# Altium PCB SensWear-V1R1-MainBoard.PcbDoc (part 2 of 3)
Units mm, origin at the board's own origin, x right, y up, seen from the top; angles counter-clockwise.
Board outline 50.5 x 8.5 mm, 4 copper layers (Top Layer, Layer 1, Layer 2, Bottom Layer), stack 0.148 mm thick; 73 components, 59 nets, 271 pads, 109 vias.
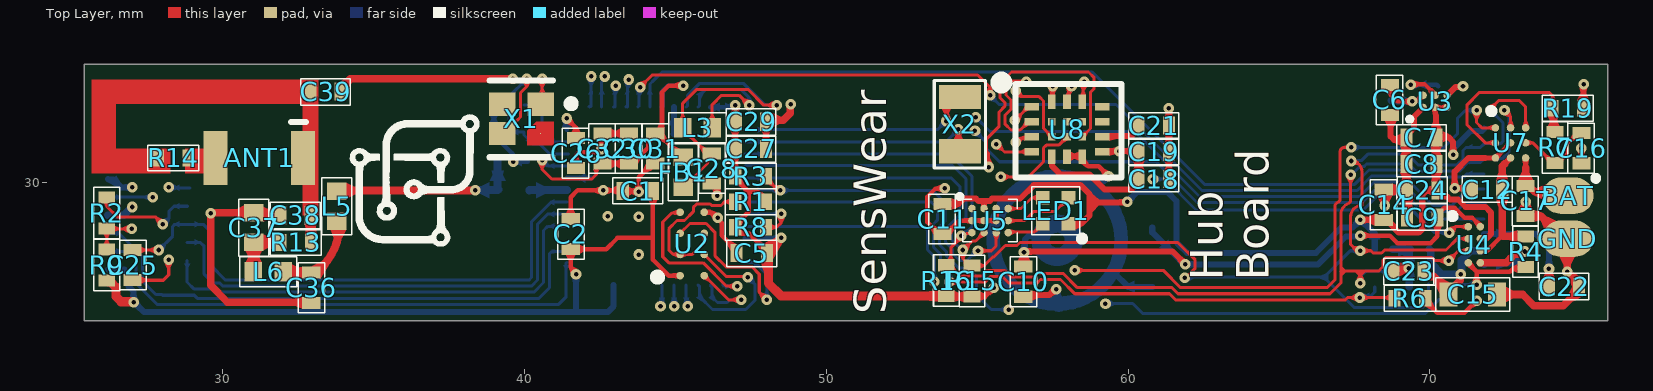
[diagram p0: Top Layer view]

## Part data (continued)
R2 R15 R16: library part ERJ-2RKF1501X, "RES SMD 1.5K OHM 1% 1/10W 0402", Manufacturer="Panasonic Electronic Components", Operating Temperature="-55°C ~ 155°C", Package / Case="0402 (1005 Metric)", Power (Watts)="0.1W, 1/10W", Resistance (Ohms)=1.5k, Supplier Device Package=0402, Supplier Part Number 1=P1.50KLDKR-ND, Temperature Coefficient=±100ppm/°C, Tolerance=±1%, Category=Resistors, ComponentLink1Description=https://industrial.panasonic.com/cdbs/www-data/pdf/RDA0000/AOA0000C283.pdf, ComponentLink1URL=https://industrial.panasonic.com/cdbs/www-data/pdf/RDA0000/AOA0000C283.pdf, Composition="Thick Film", Failure Rate=-, Features="Automotive AEC-Q200", Height - Seated (Max)="0.016\" (0.40mm)", Manufacturer Part Number=ERJ-2RKF1501X, Number of Terminations=2, Packaging=Digi-Reel®, Part Status=Active, Pricing 1="1=0.1, 10=0.025, 25=0.018, 50=0.0136, 100=0.01, 250=0.00764, 500=0.00612, 1000=0.00451, 5000=0.00323 (USD)", RoHS="RoHS Compliant", Size / Dimension="0.039\" L x 0.020\" W (1.00mm x 0.50mm)", Stock 1=1349197, Supplier 1=Digi-Key
R4: library part ERJ-2RKF1003X, "RES SMD 100K OHM 1% 1/10W 0402", Manufacturer="Panasonic Electronic Components", Operating Temperature="-55°C ~ 155°C", Package / Case="0402 (1005 Metric)", Power (Watts)="0.1W, 1/10W", Resistance (Ohms)=100k, Supplier Device Package=0402, Supplier Part Number 1=P100KLDKR-ND, Temperature Coefficient=±100ppm/°C, Tolerance=±1%, Category=Resistors, ComponentLink1Description=https://industrial.panasonic.com/cdbs/www-data/pdf/RDA0000/AOA0000C283.pdf, ComponentLink1URL=https://industrial.panasonic.com/cdbs/www-data/pdf/RDA0000/AOA0000C283.pdf, Composition="Thick Film", Failure Rate=-, Features="Automotive AEC-Q200", Height - Seated (Max)="0.016\" (0.40mm)", Manufacturer Part Number=ERJ-2RKF1003X, Number of Terminations=2, Packaging=Digi-Reel®, Part Status=Active, Pricing 1="1=0.1, 10=0.025, 25=0.018, 50=0.0136, 100=0.01, 250=0.00764, 500=0.00612, 1000=0.00451, 5000=0.00323 (USD)", RoHS="RoHS Compliant", Size / Dimension="0.039\" L x 0.020\" W (1.00mm x 0.50mm)", Stock 1=5976308, Supplier 1=Digi-Key
R13 R14: library part ERJ-2GE0R00X, "RES SMD 0.0OHM JUMPER 1/10W 0402", Manufacturer="Panasonic Electronic Components", Operating Temperature="-55°C ~ 155°C", Package / Case="0402 (1005 Metric)", Power (Watts)="0.1W, 1/10W", Resistance (Ohms)=0.0, Supplier Device Package=0402, Supplier Part Number 1=P0.0JDKR-ND, Temperature Coefficient=-, Tolerance=Jumper, Category=Resistors, ComponentLink1Description=http://industrial.panasonic.com/www-cgi/jvcr13pz.cgi?E+PZ+3+AOA0001+ERJ2GE0R00X+7+WW, ComponentLink1URL=http://industrial.panasonic.com/www-cgi/jvcr13pz.cgi?E+PZ+3+AOA0001+ERJ2GE0R00X+7+WW, Composition="Thick Film", Features="Automotive AEC-Q200", Height="0.016\" (0.40mm)", Manufacturer Part Number=ERJ-2GE0R00X, Number of Terminations=2, Packaging=Digi-Reel®, Part Status=Active, Pricing 1="1=0.07, 50=0.0104, 100=0.0078, 250=0.00584, 500=0.0043, 1000=0.00287, 5000=0.00202 (GBP)", RoHS="RoHS Compliant", Size / Dimension="0.039\" L x 0.020\" W (1.00mm x 0.50mm)", Stock 1=6022701, Supplier 1=Digi-Key
R19: library part ERJ-2RKF1002X, "RES SMD 10K OHM 1% 1/10W 0402", Manufacturer="Panasonic Electronic Components", Operating Temperature="-55°C ~ 155°C", Package / Case="0402 (1005 Metric)", Power (Watts)="0.1W, 1/10W", Resistance (Ohms)=10k, Supplier Device Package=0402, Supplier Part Number 1=P10.0KLDKR-ND, Temperature Coefficient=±100ppm/°C, Tolerance=±1%, Category=Resistors, ComponentLink1Description=https://industrial.panasonic.com/cdbs/www-data/pdf/RDA0000/AOA0000C283.pdf, ComponentLink1URL=https://industrial.panasonic.com/cdbs/www-data/pdf/RDA0000/AOA0000C283.pdf, Composition="Thick Film", Failure Rate=-, Features="Automotive AEC-Q200", Height - Seated (Max)="0.016\" (0.40mm)", Manufacturer Part Number=ERJ-2RKF1002X, Number of Terminations=2, Packaging=Digi-Reel®, Part Status=Active, Pricing 1="1=0.1, 10=0.025, 25=0.018, 50=0.0136, 100=0.01, 250=0.00764, 500=0.00612, 1000=0.00451, 5000=0.00323 (USD)", RoHS="RoHS Compliant", Size / Dimension="0.039\" L x 0.020\" W (1.00mm x 0.50mm)", Stock 1=8105773, Supplier 1=Digi-Key
U1: library part NRF54L15-QFAA-R, "nRF54L15 SoC with Arm Cortex-M33 processor", Manufacturer="Nordic Semiconductor", Supplier Part Number=949-NRF54L15-QFAA-R, Category="RF Receivers, Transceivers", Manufacturer Part Number=NRF54L15-QFAA-R, Pricing="1=6.84, 10=6.11, 50=6.11, 100=5.02, 1000=3.62, 10000=3.07 (USD)", RoHS=No, Stock=719, Supplier=Mouser
U2: "M95P32-I Series 32 Mb (4 M x 8) 80 MHz SPI EEPROM Memory IC - WLCSP-8", Manufacturer=STMicroelectronics, Supplier Part Number=497-M95P32-IXCST/EFDKR-ND, Supplier Part Number 1=511-M95P32-IXCST/EF, Category=Memory, Manufacturer Part Number=M95P32-IXCST/EF, Pricing="1=2.68, 10=2.409, 25=2.2724, 100=1.9362, 250=1.818, 500=1.59076, 1000=1.31805, 2500=1.22715 (USD)", RoHS=No, Stock=9222, Supplier=Digikey, Supplier 1=Mouser, Supplier 2=Digikey, Supplier Part Number 2=497-M95P32-IXCST/EFCT-ND
U3: "Conv DC-DC 1.8V to 6.5V Synchronous Step Down Single-Out 1.8V to 3.3V 0.75A 6-Pin DSBGA T/R", Manufacturer="Texas Instruments", Supplier Part Number=595-TPS62840YBGR, Category="Voltage Regulators - Switching", Manufacturer Part Number=TPS62840YBGR, Pricing="1=1,97, 10=1,77, 50=1,77, 100=1,42, 1000=0,972, 10000=0,865 (USD)", RoHS=Yes, Stock=2271, Supplier=Mouser, Supplier 1=Mouser, Supplier Part Number 1=595-TPS62840YBGR
U4: "1-A Li-ion I²C programmable charger with regulated power path in WCSP package 8-DSBGA -40 to 85", Manufacturer="Texas Instruments", Supplier Part Number=296-BQ25180YBGRCT-ND, Supplier Part Number 1=595-BQ25180YBGR, Category="Integrated Circuits (ICs)", Manufacturer Part Number=BQ25180YBGR, Pricing="1=2,65, 10=2,382, 25=2,2472, 100=1,9147, 250=1,7978, 500=1,57308, 1000=1,3034 (USD)", RoHS=No, Stock=2812, Supplier=Digi-Key, Supplier 1=Mouser
U5: library part LP5562TME/NOPB, "IC LED DRIVER LINEAR DIM 25.5MA", Current - Output / Channel=25.5mA, Frequency="256kHz, 558kHz", Manufacturer="Texas Instruments", Operating Temperature="-40°C ~ 85°C (TA)", Package / Case="12-WFBGA, DSBGA", Supplier Device Package=12-DSBGA, Supplier Part Number 1=296-39060-6-ND, Voltage - Output=-, Voltage - Supply (Max)=5.5V, Voltage - Supply (Min)=2.7V, Applications=Backlight, Category="Integrated Circuits (ICs)", ComponentLink1Description=http://www.ti.com/lit/ds/symlink/lp5562.pdf, ComponentLink1URL=http://www.ti.com/lit/ds/symlink/lp5562.pdf, Dimming=I²C, Internal Switch(s)=Yes, Manufacturer Part Number=LP5562TME/NOPB, Mounting Type="Surface Mount", Number of Outputs=4, Packaging=Digi-Reel®, Part Status=Active, Pricing 1="1=1.34, 10=1.195, 100=0.9314 (USD)", RoHS="RoHS Compliant", Stock 1=4154, Supplier 1=Digi-Key, Topology=-, Type=Linear
U6: "1.5A output current, buck-boost MicroSiP™ power module with integrated inductor with I²C 8-uSiP -40 to 125", Manufacturer="Texas Instruments", Manufacturer Lifecycle Status=ACTIVE, Supplier Part Number=595-TPSM831021SIUR, Category="Voltage Regulators - Switching", ComponentLink1Description=https://octopart.com:443/opatz8j6/c1?t=1vxQQwx7TOAj9FA5SAjYf-PM2GMohsbgC04BrqIyIUoGmA7zdRLwbkPi0-I8FrksUgPxUwbGCYWtwThYV-KnzQfz1oTrUxzeL5cOfaQnthmRq6ADpCLaHp5JrIbb6cgfJIMgeLAStVpvqMRJWc6Yal_MwBsyemKGdD71ihduhM8mRGYBabo_yu3Qx5wXw-xz84pVCfLzcr0zIMJbnrhY9ixfkLjguXZyMK1DFLb7NzaBV3N62BonJqonzahOnLJWkG214iKtXDOwsTkVLMpxpvY7ilA5fe2cf7_u5R_sEAjjMbnvkWUs-qzHlIvYXhlQIX-e4wdexaSxNG4YUph8zgYx4izLfMmtyaps11Lo0lWlOmAtv_UcgO7e3icqZp1421nsrlt2N-g&src-supplier=Texas+Instruments, ComponentLink1URL=https://octopart.com:443/opatz8j6/c1?t=1vxQQwx7TOAj9FA5SAjYf-PM2GMohsbgC04BrqIyIUoGmA7zdRLwbkPi0-I8FrksUgPxUwbGCYWtwThYV-KnzQfz1oTrUxzeL5cOfaQnthmRq6ADpCLaHp5JrIbb6cgfJIMgeLAStVpvqMRJWc6Yal_MwBsyemKGdD71ihduhM8mRGYBabo_yu3Qx5wXw-xz84pVCfLzcr0zIMJbnrhY9ixfkLjguXZyMK1DFLb7NzaBV3N62BonJqonzahOnLJWkG214iKtXDOwsTkVLMpxpvY7ilA5fe2cf7_u5R_sEAjjMbnvkWUs-qzHlIvYXhlQIX-e4wdexaSxNG4YUph8zgYx4izLfMmtyaps11Lo0lWlOmAtv_UcgO7e3icqZp1421nsrlt2N-g&src-supplier=Texas+Instruments, ComponentLink2Description=http://sigma.octopart.com:80/reach_statement/Texas-Instruments-company-64.pdf?src-supplier=Compliance+Statements, ComponentLink2URL=http://sigma.octopart.com:80/reach_statement/Texas-Instruments-company-64.pdf?src-supplier=Compliance+Statements, ComponentLink3Description=http://sigma.octopart.com:80/conflict_mineral_statement/Texas-Instruments-company-63.pdf?src-supplier=Compliance+Statements, ComponentLink3URL=http://sigma.octopart.com:80/conflict_mineral_statement/Texas-Instruments-company-63.pdf?src-supplier=Compliance+Statements, Length=2.6mm, Lifecycle Status=Production, Manufacturer Part Number=TPSM831021SIUR, Pins=8, Pricing="1=7.7, 10=6.91, 50=6.91, 100=5.66, 1000=4.06, 10000=3.86 (USD)", RoHS=Compliant, Stock=2610, Supplier=Mouser, Supplier 1=Mouser, Supplier Part Number 1=595-TPSM831021SIUR, Thickness=1.15mm, Topology=Buck-Boost, Width=2mm
U7: "Single-cell battery fuel gauge with pre-programmed chemistry and integrated sense resistor 9-DSBGA -40 to 85", Manufacturer="Texas Instruments", Supplier Part Number=595-BQ27427YZFR, Manufacturer Part Number=BQ27427YZFR, Pricing="1=2,56, 10=2,31, 50=2,18, 100=1,86, 1000=1,26, 10000=1,15 (USD)", RoHS=No, Stock=1221, Supplier=Mouser, Supplier 1=Mouser, Supplier Part Number 1=595-BQ27427YZFR
U8: "Programmable smart sensor combining accelerometer, gyroscope and fusion software", Manufacturer="Bosch Tools", Supplier Part Number=828-BHI360DKR-ND, Category=Uncategorized, Checked=TRUE, Manufacturer Part Number=BHI360, Pricing="1=6.54, 10=5.232, 25=4.8396, 100=4.1854, 500=3.92384, 1000=3.66226 (USD)", RoHS=No, Stock=17060, Supplier=Digikey, Supplier 1=Digikey, Supplier 2=Mouser, Supplier Part Number 1=828-BHI360DKR-ND, Supplier Part Number 2=262-BHI360
X1: library part ABM11W-32.0000MHZ-8-B1U-T3, "CRYSTAL 32.0000MHZ 8PF SMD, 2x1.6mm, RoHS", Manufacturer=Abracon, Supplier Part Number=535-13899-1-ND, Supplier Part Number 1=815-11W32-8B1UT, Category=Crystals, Checked=TRUE, ComponentLink1Description=https://abracon.com/Resonators/ABM11W.pdf?src-supplier=Digikey, ComponentLink1URL=https://abracon.com/Resonators/ABM11W.pdf?src-supplier=Digikey, ComponentLink2Description=https://datasheet.octopart.com/ABM11W-32.0000MHZ-8-B1U-T3-Abracon-datasheet-112015802.pdf?src-supplier=Master+Electronics, ComponentLink2URL=https://datasheet.octopart.com/ABM11W-32.0000MHZ-8-B1U-T3-Abracon-datasheet-112015802.pdf?src-supplier=Master+Electronics, Frequency="32 MHz", Manufacturer Part Number=ABM11W-32.0000MHZ-8-B1U-T3, Pricing="1=0.82, 10=0.709, 50=0.6394, 100=0.6115, 500=0.5517, 1000=0.52788 (USD)", RoHS=Yes, Stock=52771, Supplier=Digikey, Supplier 1=Mouser, Supplier 2=Digikey, Supplier 3=Digikey, Supplier 4=Digikey, Supplier Part Number 2=535-13899-1-ND, Supplier Part Number 3=535-13899-6-ND, Supplier Part Number 4=535-13899-2-ND
X2: library part ABS06-32.768KHZ-1-T, "CRYSTAL 32.768 KHZ 12.5 PF SMD", ESR (Equivalent Series Resistance)="90 kOhm", Frequency Stability=-, Frequency Tolerance=±10ppm, Load Capacitance=12.5pF, Manufacturer="Abracon Corporation", Operating Mode=Fundamental, Operating Temperature="-40°C ~ 85°C", Package / Case=2-SMD, Supplier Part Number 1=535-10248-6-ND, Category="Crystals and Oscillators", ComponentLink1Description=http://www.abracon.com/Resonators/ABS06.pdf, ComponentLink1URL=http://www.abracon.com/Resonators/ABS06.pdf, Frequency=32.768kHz, Height="0.024\" (0.60mm)", Manufacturer Part Number=ABS06-32.768KHZ-1-T, Mounting Type="Surface Mount", Packaging=Digi-Reel®, Pricing 1="1=2.25, 10=1.952, 50=1.711, 100=1.3508, 500=1.14066, 750=0.99659, 1000=0.90053 (EUR)", Ratings=-, RoHS="RoHS Compliant", Size / Dimension="0.079\" L x 0.047\" W (2.00mm x 1.20mm)", Stock 1=6467, Supplier 1=Digi-Key, Type="kHz Crystal (Tuning Fork)"

## Via types
v1: diameter 0.35, hole 0.15, Top Layer to Bottom Layer, tented both sides, 109 vias

## Nets (pads, with @x,y where several pads share a name; then routed paths per layer and width w, separated by ;. In a path a pad name is that pad's centre, name@x,y a point inside that pad or via, vN(x,y) a via of type N, cw(c..) or ccw(c..) an arc to the next point about the centre after c; other vN are vias at no path point)
1V8: C1.1 C2.1 C5.2 C6.1 C18.2 C19.2 C22.2 C26.1 C27.1 C29.1 L1.2 P2.1 P3.8 R1.2 R3.1 R6.1 R8.1 R9.1 R15.1 R16.1 U1.10 U1.22 U1.36 U1.47 U1.48 U2.A2 U3.A2 U8.5 U8.8 | length 91.1
  Top Layer w0.15: v1(41.392,32.109) 41.702,31.799 C26.1@41.702,31.611 ; v1(41.702,26.951) 41.702,27.005 41.527,27.18 C2.1@41.527,27.776 42.701,27.776 43.075,28.15 44.25,28.15 ; C2.1@41.727,27.676 C2.1@41.752,27.701 ; C1.1@44.252,29.751 C1.1@44.252,29.701 44.252,28.776 44.252,27.426 44.777,26.901 U2.A2@45.152,26.901 ; v1(46.977,32.551) v1(46.977,32.551) R3.1@46.978,30.2 ; R3.1@46.98,30.2 46.98,30.125 47.425,29.68 ; C29.1@47.002,32.001 46.989,32.014 46.989,32.514 v1@47.002,32.526 ; C5.2@47.925,27.8 47.925,27.85 47.9,27.875 47.85,27.875 47.425,28.3 47.105,28.3 46.98,28.425 R8.1@46.98,28.5 46.98,28.575 47.425,29.02 47.425,29.68 ; R1.2@48,29.35 48,29.425 47.875,29.55 47.841,29.55 47.716,29.675 47.43,29.675 47.425,29.68 ; C6.1@68.7,33.2 68.7,32.89 68.915,32.675 v1(69.425,32.675) 69.463,32.713 69.586,32.713 69.748,32.875 U3.A2@69.775,32.875 ; R6.1@69.85,26.15 69.85,26.075 70.25,25.675 71.15,25.675 v1(71.55,26.075)
  Top Layer w0.2: R16.1@53.975,26.225 54.004,26.196 54.919,26.196 R15.1@54.919,26.215 ; R15.1@54.825,26.215 R15.1@54.919,26.215 ; R15.1@54.919,26.234 R15.1@54.919,26.215 ; v1@55.475,26.45 55.24,26.215 R15.1@54.919,26.215 ; U8.5@57.475,30.862 U8.5@57.475,30.837 57.475,30.542 57.767,30.25 58.725,30.25 59.225,29.75 60.1,29.75 60.35,30 C18.2@60.35,30.1 60.35,30.975 C19.2@60.339,30.986 ; U8.8@59.138,31.025 v1(59.7,31.025) 59.95,31.025 60.325,31.025 C19.2@60.35,31 ; C22.2@73.95,26.525 v1(73.95,27.125)
  Top Layer w0.3: R9.1@26.15,26.74 26.2,26.69 26.275,26.69 26.45,26.515 26.45,26.21 26.626,26.035 27.04,26.035 v1(27.05,26.025) ; C5.2@48.025,27.65 48.075,27.6 48.075,26.651 48.501,26.225 R16.1@53.957,26.225 ; C5.2@48.15,27.8 v1(48.5,28.15)
  Layer 2 w0.3: v1(41.392,32.109) 42.092,31.409 42.092,28.336 42.577,27.851 ; v1(41.702,26.951) 42.426,26.951 42.602,27.127 42.602,27.801 ; 42.602,27.851 42.602,27.801 ; v1(48.5,28.15) 42.95,28.15 42.602,27.801 ; v1@55.537,26.513 55.54,26.51 55.573,26.51 55.764,26.7 55.915,26.7 56.265,27.05 56.651,27.05 58.425,28.824 58.425,30.724 58.726,31.025 v1(59.7,31.025) 60.5,31.825 69.1,31.825
  Bottom Layer w0.15: v1(41.392,32.109) 41.392,31.746 U1.36@41.402,31.736 ; 41.702,25.723 41.725,25.7 ; U1.47@46.152,32.486 U1.48@46.552,32.486 46.857,32.486 46.922,32.551 v1(46.977,32.551) ; U1.10@47.302,28.136 47.309,28.143 48.493,28.143 v1(48.5,28.15)
  Bottom Layer w0.2: P2.1@26.19,27.1 26.73,27.1 26.875,26.955 26.875,26.539 27.034,26.38 27.034,26.055 v1@27.05,26.039 ; v1(27.05,26.025) 27.375,25.7 41.725,25.7 42.764,25.7 42.952,25.888 U1.22@42.952,26.586 ; 41.702,25.723 v1(41.702,26.951) ; L1.2@68.7,32.7 68.725,32.675 v1(69.425,32.675) ; P3.8@71.8,28.275 73.525,28.275 73.95,27.85 v1(73.95,27.125) v1@73.975,27.1
  Bottom Layer w0.3: v1(27.05,26.025) v1@27.05,26.039
  other v1: 55.55,26.5
CHG_AC: AC.1 C9.1 C10.2 P1.1 P2.11 U4.A2 | length 55.9
  Top Layer w0.15: v1(67.7,28.225) 68.678,28.225 68.928,27.975 70.025,27.975 70.25,28.2 C9.1@70.25,28.825 70.25,28.925 70.475,29.15 70.82,29.15 71.145,28.825 71.399,28.825 71.675,28.549 U4.A2@71.675,28.525
  Top Layer w0.2: C10.2@56.55,27.3 v1(56.55,27.675) 56.575,27.7 61.475,27.7 v1(61.9,27.275)
  Layer 1 w0.15: v1(27,29.825) 26.99,29.815 26.69,29.815 26.525,29.65 26.525,26.925 26.975,26.475 27.75,26.475 27.987,26.238 45.612,26.238 46.1,25.75 55.325,25.75 56.55,26.975 v1(56.55,27.675)
  Bottom Layer w0.2: P2.11@26.19,30.1 26.2,30.09 26.36,30.09 26.625,29.825 v1(27,29.825) ; v1(56.55,27.675) 56.579,27.704 56.579,28.095 56.696,28.212 57.038,28.212 57.05,28.2 ; AC.1@60.8,28.5 60.8,28.334 v1@61.859,27.275 ; v1(61.9,27.275) 66.3,27.275 67.221,28.196 67.671,28.196 v1(67.7,28.225)
CHG_IRQ: R3.2 U1.6 U4.A1 | length 34.1
  Top Layer w0.1: R3.2@48,30.2 48,30.125 48.352,29.773 48.427,29.773 v1(48.475,29.725) ; v1(70.65,28.325) 70.85,28.525 U4.A1@71.275,28.525
  Layer 2 w0.1: v1@56.03,25.795 58.93,25.795 59.075,25.65 59.385,25.65 59.584,25.849 59.584,26.101 58.925,26.76 58.925,29.55 59.125,29.75 60.475,29.75 v1(60.825,30.1)
  Bottom Layer w0.1: U1.6@47.302,29.736 47.307,29.731 48.469,29.731 v1(48.475,29.725) 53.525,29.725 53.925,29.325 53.925,28.7 53.75,28.525 53.75,28.091 53.75,27.925 53.983,27.692 53.983,27.55 54.383,27.15 54.7,27.15 54.975,26.875 54.975,26.265 55.465,25.775 56,25.775 v1@56.025,25.8 ; v1(60.825,30.1) 61.229,30.1 62.254,29.075 67.791,29.075 67.82,29.104 68.316,29.6 68.885,29.6 70.16,28.325 v1(70.65,28.325)
  other v1: 56.05,25.775